# Altium PCB NODE_MCU_EXTEND_Project.PcbDoc
Units mil, origin at the board's own origin, x right, y up, seen from the top; angles counter-clockwise.
Board outline 1909.79 x 1010.03 mil, 2 copper layers (Top Layer, Bottom Layer); 28 components, 47 nets, 129 pads, 20 vias.
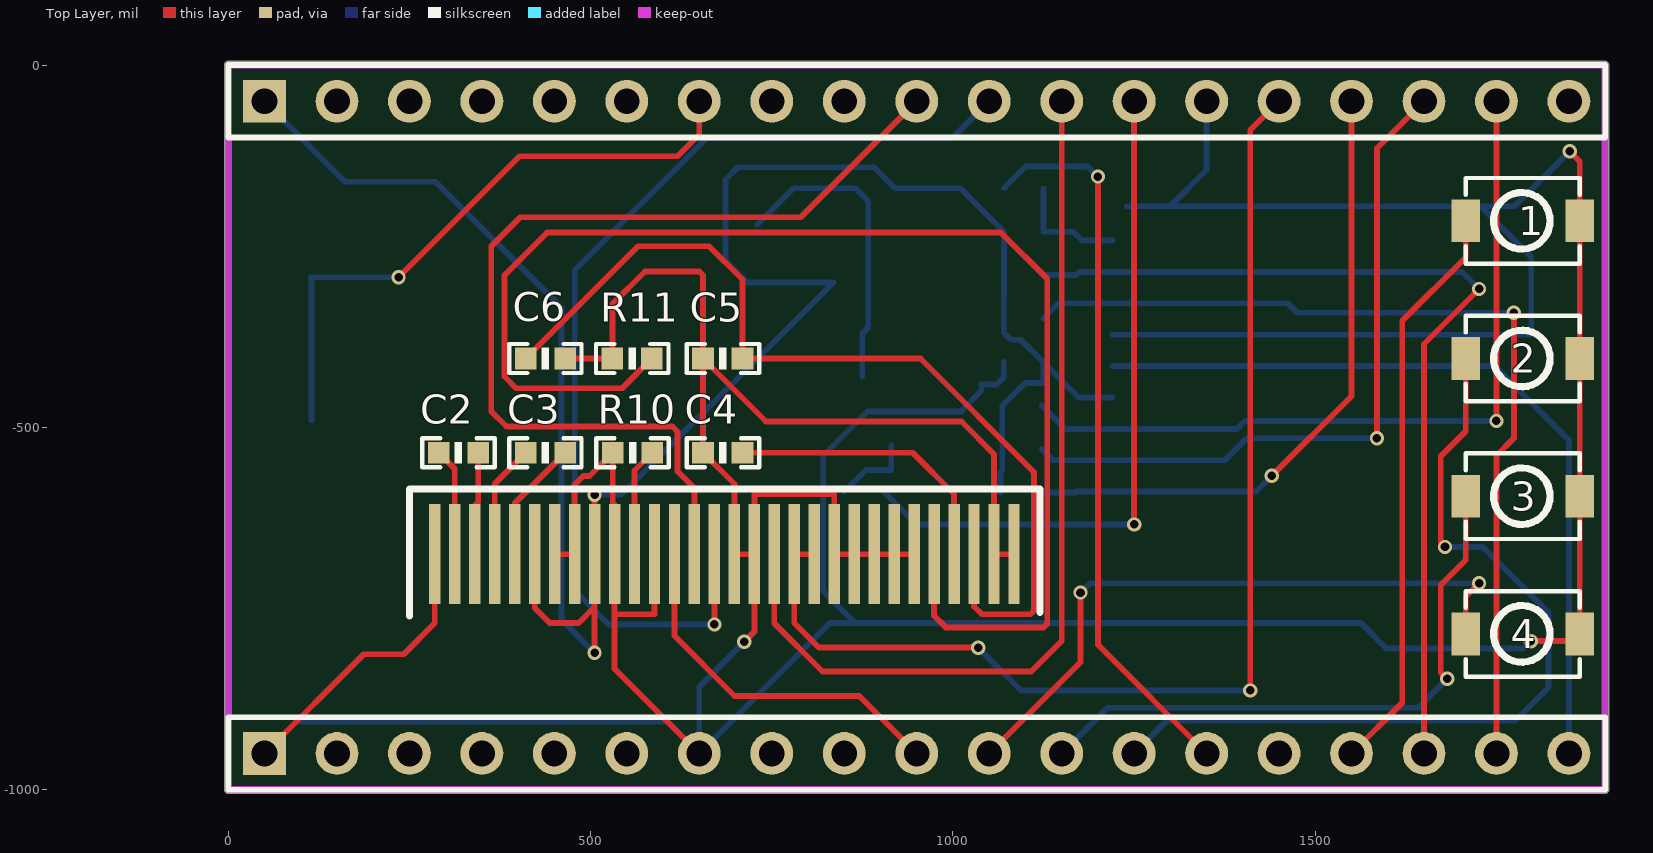
[diagram p0: Top Layer view]
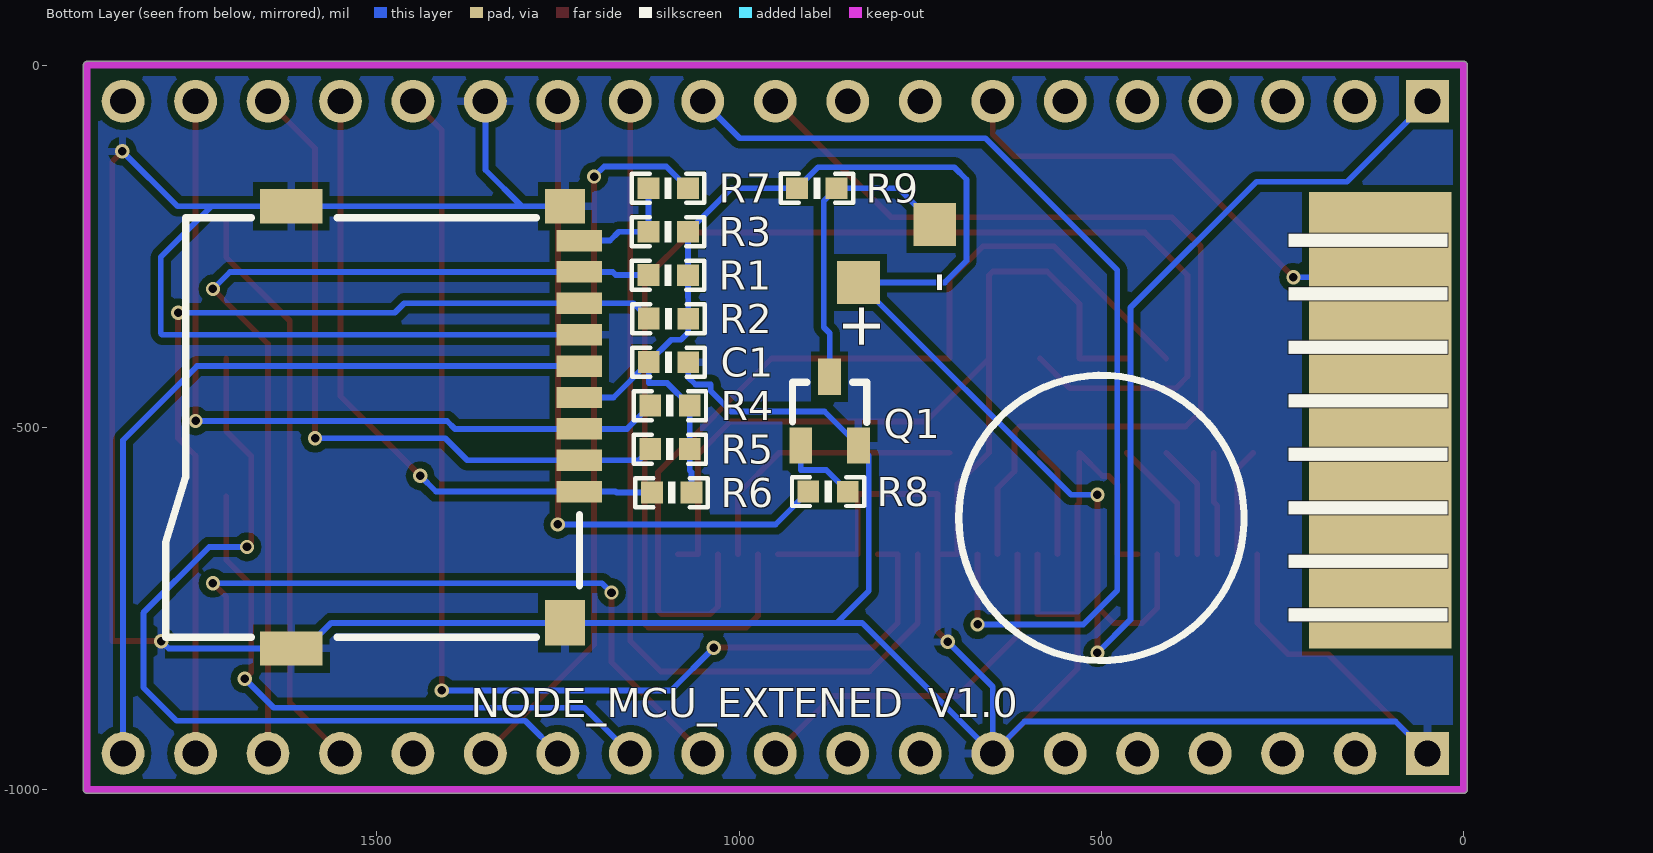
[diagram p1: Bottom Layer view, seen from below]

## Layer stack, top to bottom
Top Solder: solder mask 0.4, Solder Resist, Dk 3.5
Top Layer: signal copper 1.4
Dielectric 1: dielectric 12.6, FR-4, Dk 4.8
Bottom Layer: signal copper 1.4
Bottom Solder: solder mask 0.4, Solder Resist, Dk 3.5

## Board outline
0,-1005.01 cw(c0,-1000) -5.01,-1000 -5.01,0 cw(c0,0) 0,5.01 1899.76,5.01 cw(c1899.76,0) 1904.78,0 1904.78,-1000 cw(c1899.76,-1000) 1899.76,-1005.01

## Design rules (kind name [scope] priority, off if disabled: settings)
Clearance [All] p1: gap=10 ignorepadtopadclearanceinfootprint=FALSE except(0: Arc-Hole Track-Hole SMDPad-Hole THPad-Hole Via-Hole Fill-Hole Poly-Hole Region-Hole Text-Hole)
PolygonConnect [All] p1: connectstyle=Relief reliefconductorwidth=10 reliefentries=4 polygonreliefangle="90 Angle" airgapwidth=10
RoutingVias [All] p1: holewidth=11.81 width=19.68 viastyle="Through Hole" minholewidth=11.81 minwidth=19.68 maxholewidth=11.81 maxwidth=19.68
SolderMaskExpansion [All] p1: expansion=4
Width [All] p1: maxlimit=8 minlimit=8 preferedwidth=8
30 further rules are at their usual default settings.

## Classes and differential pairs
component class NODE_MCU_EXTEND_Project: C1 C2 C3 C4 C5 C6 Q1 R1 R2 R3 R4 R5 R6 R7 R8 R9 R10 R11

## Components (designator, comment, footprint, x,y, rotation, side; value= is the part's Value field where it differs from the comment)
1 "KEY_M" KEY 1865,-215 r180 top (schematic designator K1)
2 "KEY_M" KEY 1865,-405 r180 top (schematic designator K2)
3 "KEY_M" KEY 1865,-595 r180 top (schematic designator K3)
4 "KEY_M" KEY 1865,-785 r180 top (schematic designator K4)
C1 "10uF" "0603P - duplicate" 1097.5,-409.94 r180 bottom
C2 "1uF" "0603P - duplicate" 317.5,-534.94 r0 top
C3 "1uF" "0603P - duplicate" 437.5,-534.94 r0 top
C4 "2.2uF" "0603P - duplicate" 682.5,-535 r180 top
C5 "2.2uF" "0603P - duplicate" 682.5,-405.06 r180 top
C6 "2.2uF" "0603P - duplicate" 437.5,-404.94 r0 top
m1 "motor" motor 380,-370 r90 bottom
OLED1 "OLED12864" OLED_1.3 750,20 r0 top
P1 "" HDR1X19 50,-50 r0 top
P2 "HEAD1*19" HDR1X19 50,-950 r0 top
Q1 "9013" SOT23-JL 874.96,-477.56 r270 bottom
R1 "10K" "0603P - duplicate" 1098,-289.94 r180 bottom
R2 "10K" "0603P - duplicate" 1097.5,-349.94 r180 bottom
R3 "10K" "0603P - duplicate" 1098,-230 r180 bottom
R4 "10K" "0603P - duplicate" 1095.5,-469.94 r180 bottom
R5 "10K" "0603P - duplicate" 1095.5,-529.94 r180 bottom
R6 "10K" "0603P - duplicate" 1093,-590 r180 bottom
R7 "10K" "0603P - duplicate" 1098,-169.94 r180 bottom
R8 "10K" "0603P - duplicate" 877,-588.7 r0 bottom
R9 "1K" "0603P - duplicate" 892.5,-170.06 r0 bottom
R10 "1K" "0603P - duplicate" 558,-535 r180 top
R11 "560K" "0603P - duplicate" 557.5,-405.06 r180 top
SD_CARD1 "" CON-TFCARD/AUTO-EJECT 1633.7,-305.24 r270 bottom
t1 "touch_key" touch_key 115,-490 r180 bottom

## Footprints (in the part's own frame and the unit in brackets; to place one, negate y for a bottom-side part, rotate by r counter-clockwise, add the part's x,y. Pads: shape width x height; smd on the part's side, far side on the other; paste and mask are expansions set on the pad)
"0603P - duplicate" [mil]
  rect 30x30 smd: 1(-27,0) 2(27.5,-0.06)
  silkscreen extent -50,-20 50,20
CON-TFCARD/AUTO-EJECT [mm]
  rect 0.75x1.6 smd: 1(7.2,10.5) 2(6.1,10.5) 3(5,10.5) 4(3.9,10.5) 5(2.8,10.5) 6(1.7,10.5) 7(0.6,10.5) 8(-0.5,10.5) 9(-1.6,10.5)
  rect 1.2x1.4 smd: 10(-2.8,10)
  rect 1.2x2.2 smd: 11(-2.8,0.4) 12(12.7,0.4)
  rect 1.6x1.4 smd: 13(11.8,10)
  silkscreen extent -2.4,-4 12.3,10.5
HDR1X19 [mm]
  rect 1.5x1.5 hole 0.9: 1(0,0)
  round 1.5 hole 0.9: 2(2.54,0) 3(5.08,0) 4(7.62,0) 5(10.16,0) 6(12.7,0) 7(15.24,0) 8(17.78,0) 9(20.32,0) 10(22.86,0) 11(25.4,0) 12(27.94,0) 13(30.48,0) 14(33.02,0) 15(35.56,0) 16(38.1,0) 17(40.64,0) 18(43.18,0) 19(45.72,0)
  silkscreen extent -1.27,-1.27 46.99,1.27
KEY [mm]
  rect 1x1.5 smd: 1(0,0) 2(4,0)
  silkscreen extent 0,-1.5 4,1.5
motor [mm]
  rect 1.5x1.5 smd: 1(1.778,11.557) 2(3.81,8.89)
  silkscreen extent -11.48,-1.95 -1.48,8.05
OLED_1.3 [mm]
  rect 0.4x3.5 smd: 1(-11.811,-17.653) 2(-11.111,-17.653) 3(-10.411,-17.653) 4(-9.711,-17.653) 5(-9.011,-17.653) 6(-8.311,-17.653) 7(-7.611,-17.653) 8(-6.911,-17.653) 9(-6.211,-17.653) 10(-5.511,-17.653) 11(-4.811,-17.653) 12(-4.111,-17.653) 13(-3.411,-17.653) 14(-2.711,-17.653) 15(-2.011,-17.653) 16(-1.311,-17.653) 17(-0.611,-17.653) 18(0.089,-17.653) 19(0.789,-17.653) 20(1.489,-17.653) 21(2.189,-17.653) 22(2.889,-17.653) 23(3.589,-17.653) 24(4.289,-17.653) 25(4.989,-17.653) 26(5.689,-17.653) 27(6.389,-17.653) 28(7.089,-17.653) 29(7.789,-17.653) 30(8.489,-17.653)
  silkscreen extent -12.7,-19.81 9.4,-15.37
SOT23-JL [mm]
  rect 1.27x0.8 smd: 1(1.205,-1.015) 2(1.205,1.015) 3(-1.205,0)
  silkscreen extent -1.01,-1.3 0.39,1.3
touch_key [mm]
  rect 5x16 smd: 1(0,0)

## Part data
C1 C2 C3 C4 C5 C6: library part C
P1: library part "Header 19 Up", "Header, 16-Pin", LatestRevisionDate=17-Jul-2002, LatestRevisionNote="Re-released for DXP Platform.", Publisher="Altium Limited"
P2: library part "Header 19 Down", LatestRevisionDate=17-Jul-2002, LatestRevisionNote="Re-released for DXP Platform.", Publisher="Altium Limited"
Q1: library part NPN
R1 R2 R3 R4 R5 R6 R7 R8 R9 R10 R11: library part R
SD_CARD1: library part "sd card"
m1: LatestRevisionDate=17-Jul-2002, LatestRevisionNote="Re-released for DXP Platform.", Publisher="Altium Limited"

## Via types
v1: diameter 19.68, hole 11.81, Top Layer to Bottom Layer, 20 vias

## Nets (pads, with @x,y where several pads share a name; then routed paths per layer and width w, separated by ;. In a path a pad name is that pad's centre, name@x,y a point inside that pad or via, vN(x,y) a via of type N, cw(c..) or ccw(c..) an arc to the next point about the centre after c; other vN are vias at no path point)
3V3: C1.1 m1.1 OLED1.6 OLED1.9 P1.1 R1.2 R2.2 R3.2 R4.2 R5.2 R6.2 R9.2 SD_CARD1.4 | length 3114.5
  Top Layer w8: OLED1.6 422.8,-749.32 443.47,-770 483.47,-770 505.47,-748 ; v1(505.47,-811) 505.47,-748 ; v1(505.47,-593) OLED1.9 505.47,-748
  Bottom Layer w8: P1.1 161,-161 286,-161 460,-335 460,-765.53 v1(505.47,-811) ; v1(505.47,-593) 542,-593 m1.1 716,-300 686,-270 686,-158 703,-141 891,-141 R9.2 1010.44,-170 R3.2 R1.2 1070.5,-320.5 1070,-321 R2.2 1070,-369 1080,-379 1093.56,-379 C1.1 ; R6.2 1065.5,-562 1068,-559.5 R5.2 R4.2 1099,-439 1124.5,-439 C1.1 ; SD_CARD1.4 1173.34,-458.78 C1.1
5V: P1.19
CLK: P2.19 SD_CARD1.5 | length 1104.3
  Bottom Layer w8: SD_CARD1.5 1747.79,-415.47 1850,-517.68 P2.19
CMD: P1.18 R4.1 SD_CARD1.3 | length 1086.5
  Top Layer w8: v1(1750,-491.16) P1.18
  Bottom Layer w8: R4.1 1154.65,-502.09 SD_CARD1.3 1392.16,-502.09 1403.09,-491.16 v1(1750,-491.16)
EN: P1.2
GND: 1.1 2.1 3.1 4.1 C1.2 C4.2 C5.2 C6.2 OLED1.1 OLED1.7 OLED1.8 OLED1.10 OLED1.12 OLED1.16 OLED1.17 OLED1.21 OLED1.22 OLED1.23 OLED1.24 OLED1.25 OLED1.29 OLED1.30 P1.14 P2.1 P2.7 Q1.2 R10.2 R11.2 SD_CARD1.6 SD_CARD1.10 SD_CARD1.11 SD_CARD1.12 SD_CARD1.13 | length 8019.2
  Top Layer w8: P2.1 187,-813 242,-813 285,-770 OLED1.1 ; OLED1.7 OLED1.8 477.91,-579.11 490,-567.02 498.41,-567.02 R10.2 530.5,-604.47 533.03,-607 OLED1.10 533.03,-758 ; C6.2 R11.2 530,-330 575,-285 650,-285 655,-290 C5.2 ; OLED1.12 588.15,-758 533.03,-758 ; P2.7 533.03,-833.03 533.03,-758 ; v1(712,-796) 725.94,-782.06 OLED1.17 ; OLED1.25 OLED1.24 OLED1.23 OLED1.22 OLED1.21 836.18,-592 725.94,-592 OLED1.17 ; OLED1.30 OLED1.29 1056.65,-537 1011.65,-492 742,-492 C5.2 ; v1(1797.24,-795) 1865,-795 4.1 3.1 2.1 1.1 1865,-133 v1(1851,-119) ; C5.2 C4.2 698.39,-578.32 OLED1.16 OLED1.17
  Bottom Layer w8: P2.1 94,-906 606,-906 P2.7 ; v1(712,-796) 650,-858 P2.7 ; C1.2 1070,-431 1060,-441 1039,-441 1039,-450 1011,-478 882,-478 Q1.2 821,-539 821,-726 864.8,-769.8 ; SD_CARD1.6 1795.83,-372.17 1798,-370 1798,-265 1728,-195 ; SD_CARD1.10 1300,-195 ; P1.14 1350,-145 1300,-195 ; v1(1797.24,-795) 1787,-805.24 SD_CARD1.12 1598,-805.24 1562.57,-769.8 SD_CARD1.13 864.8,-769.8 ; v1(1851,-119) 1775,-195 1728,-195 ; P2.7 830.2,-769.8 864.8,-769.8 ; 1300,-195 SD_CARD1.11 1728,-195
NetC2_1: C2.1 OLED1.2 | length 149.2
  Top Layer w8: C2.1 312.56,-557 OLED1.2
NetC2_2: C2.2 OLED1.3 | length 142
  Top Layer w8: OLED1.3 340.12,-608 345,-603.12 C2.2
NetC3_1: C3.1 OLED1.4 | length 157.8
  Top Layer w8: OLED1.4 367.68,-577.76 C3.1
NetC3_2: C3.2 OLED1.5 | length 168.9
  Top Layer w8: OLED1.5 395.24,-604.76 C3.2
NetC4_1: C4.1 OLED1.27 | length 398.6
  Top Layer w8: C4.1 944.54,-535 1001.54,-592 OLED1.27
NetC5_1: C5.1 C6.1 OLED1.28 | length 1311.4
  Top Layer w8: C6.1 565.44,-250 663.44,-250 709.5,-296.06 C5.1 955.06,-405.06 1112,-562 1112,-753 1107,-758 1040,-758 1029.09,-747.09 OLED1.28
Netm1_2: m1.2 Q1.3 R9.1 | length 426.8
  Bottom Layer w8: m1.2 779.94,-170.06 R9.1 883,-187.56 883,-362 874.96,-370.04 Q1.3
NetOLED1_11: OLED1.11 R10.1 | length 150.1
  Top Layer w8: OLED1.11 560.59,-559.41 R10.1
NetOLED1_26: OLED1.26 R11.1 | length 1892.8
  Top Layer w8: R11.1 543.56,-446 397,-446 381,-430 381,-290 440,-231 1066,-231 1130,-295 1130,-771 1125,-776 989.98,-776 973.98,-760 OLED1.26
NetQ1_1: Q1.1 R8.1 | length 111.2
  Bottom Layer w8: R8.1 879.7,-559 914.92,-559 Q1.1
NetR3_1: R3.1 R7.1 SD_CARD1.9 | length 160.5
  Bottom Layer w8: R7.1 R3.1 1166,-230 1178.24,-242.24 SD_CARD1.9
P0: P2.14 R7.2 | length 1005.9
  Top Layer w8: v1(1200,-154) 1200,-800 P2.14
  Bottom Layer w8: R7.2 1100.5,-140 1186,-140 v1(1200,-154)
P2: P2.15
P4: 2.2 P2.13 | length 1170.2
  Top Layer w8: v1(1679,-665) 1673,-659 1673,-540 1707.52,-505.48 2.2
  Bottom Layer w8: P2.13 1295.16,-904.84 1776.16,-904.84 1822,-859 1822,-756 1731,-665 v1(1679,-665)
P5: OLED1.13 P2.10 | length 514.2
  Top Layer w8: OLED1.13 615.71,-787.71 698.55,-870.55 870.55,-870.55 P2.10
P12: P1.13 R8.2 | length 948.3
  Top Layer w8: v1(1250,-634) P1.13
  Bottom Layer w8: R8.2 949.86,-634 v1(1250,-634)
P13: OLED1.19 OLED1.20 P1.15 | length 1619.7
  Top Layer w8: OLED1.20 OLED1.19 781.06,-770 815.06,-804 v1(1035,-804) ; v1(1410.16,-863) 1410.16,-89.84 P1.15
  Bottom Layer w8: v1(1035,-804) 1094,-863 v1(1410.16,-863)
P14: OLED1.18 P1.12 | length 1281.9
  Top Layer w8: OLED1.18 753.5,-770.5 820,-837 1108,-837 1150,-795 P1.12
P15: 1.2 P2.16 | length 800.2
  Top Layer w8: P2.16 1620,-880 1620,-353 1707.52,-265.48 1.2
P16: 3.2 P2.12 | length 844.7
  Top Layer w8: v1(1682,-847) 1673,-838 1673,-717.67 1707.52,-683.15 3.2
  Bottom Layer w8: P2.12 1213.16,-886.84 1642.16,-886.84 v1(1682,-847)
P17: 4.2 P2.11 | length 907.2
  Top Layer w8: P2.11 1176,-824 v1(1176,-728) ; 4.2 1707.52,-733.48 v1(1726,-715)
  Bottom Layer w8: v1(1176,-728) 1189,-715 v1(1726,-715)
P18: P2.9
P19: P2.8
P21: P2.6
P22: P2.3
P23: P2.2
P25: P1.9
P26: OLED1.14 P1.10 | length 1345.1
  Top Layer w8: OLED1.14 643.27,-584 620,-560.73 620,-506 613,-499 384,-499 363,-478 363,-250 403,-210 790,-210 P1.10
P27: OLED1.15 P1.11 | length 1419.8
  Top Layer w8: v1(670.83,-772) OLED1.15
  Bottom Layer w8: v1(670.83,-772) 525,-772 478,-725 478,-283 660,-101 999,-101 P1.11
P32: P1.7 t1.1 | length 859.6
  Top Layer w8: v1(235,-293) 402,-126 620,-126 650,-96 P1.7
  Bottom Layer w8: t1.1 115,-293 v1(235,-293)
P33: P1.8
P34: P1.5
P35: P1.6
RX: P2.5
SD0: P2.18 R2.1 SD_CARD1.7 | length 1281.6
  Top Layer w8: P2.18 1750,-539 1774,-515 v1(1774,-342)
  Bottom Layer w8: R2.1 1145.58,-328.86 SD_CARD1.7 1461.86,-328.86 1475,-342 v1(1774,-342)
SD1: P2.17 R1.1 SD_CARD1.8 | length 1285
  Top Layer w8: P2.17 1650,-385 v1(1726,-309)
  Bottom Layer w8: R1.1 1170,-289.94 1174.38,-285.55 SD_CARD1.8 1702.55,-285.55 v1(1726,-309)
SD2: P1.16 R6.1 SD_CARD1.1 | length 892.1
  Top Layer w8: v1(1440.06,-566.94) 1550,-457 P1.16
  Bottom Layer w8: R6.1 1169,-590 1170.3,-588.7 SD_CARD1.1 1418.3,-588.7 v1(1440.06,-566.94)
SD3: P1.17 R5.1 SD_CARD1.2 | length 973.4
  Top Layer w8: v1(1585,-515) 1585,-115 P1.17
  Bottom Layer w8: R5.1 1137.96,-545.39 SD_CARD1.2 1375,-545.39 1405.39,-515 v1(1585,-515)
SVN: P1.4
SVP: P1.3
TX: P2.4

## Polygon pours and split planes (outlines as drawn)
GND on Bottom Layer "Top Layer-No Net" (solid, pour order 10): 0,-1005.01 cw(c0,-1000) -5.01,-1000 -5.01,0 cw(c0,0) 0,5.01 1899.76,5.01 cw(c1899.76,0) 1904.78,0 1904.78,-1000 cw(c1899.76,-1000) 1899.76,-1005.01

## Keep-outs
Keep-Out Layer:
  lines w10: 0,-1000 1899.76,-1000 1899.76,0 0,0 0,-1000

## Silkscreen, mask and mechanical layers (free items; w line width, h text height)
Bottom Overlay:
  text "||||||||" at 190,-205 h160 r90
  text "NODE_MCU_EXTENED  V1.0" at 1370,-900 h40

## Text inside footprints (layer, text, board x,y; h text height)
m1: Bottom Overlay "-" at 700,-315 h60 r270; Bottom Overlay "+" at 805,-395 h60 r270